# Altium PCB AD8302.PcbDoc
Units mil, origin at the board's own origin, x right, y up, seen from the top; angles counter-clockwise.
Board outline 1235 x 1010 mil, 2 copper layers (Top Layer, Bottom Layer), stack 54.77 mil thick; 20 components, 14 nets, 71 pads, 228 vias.
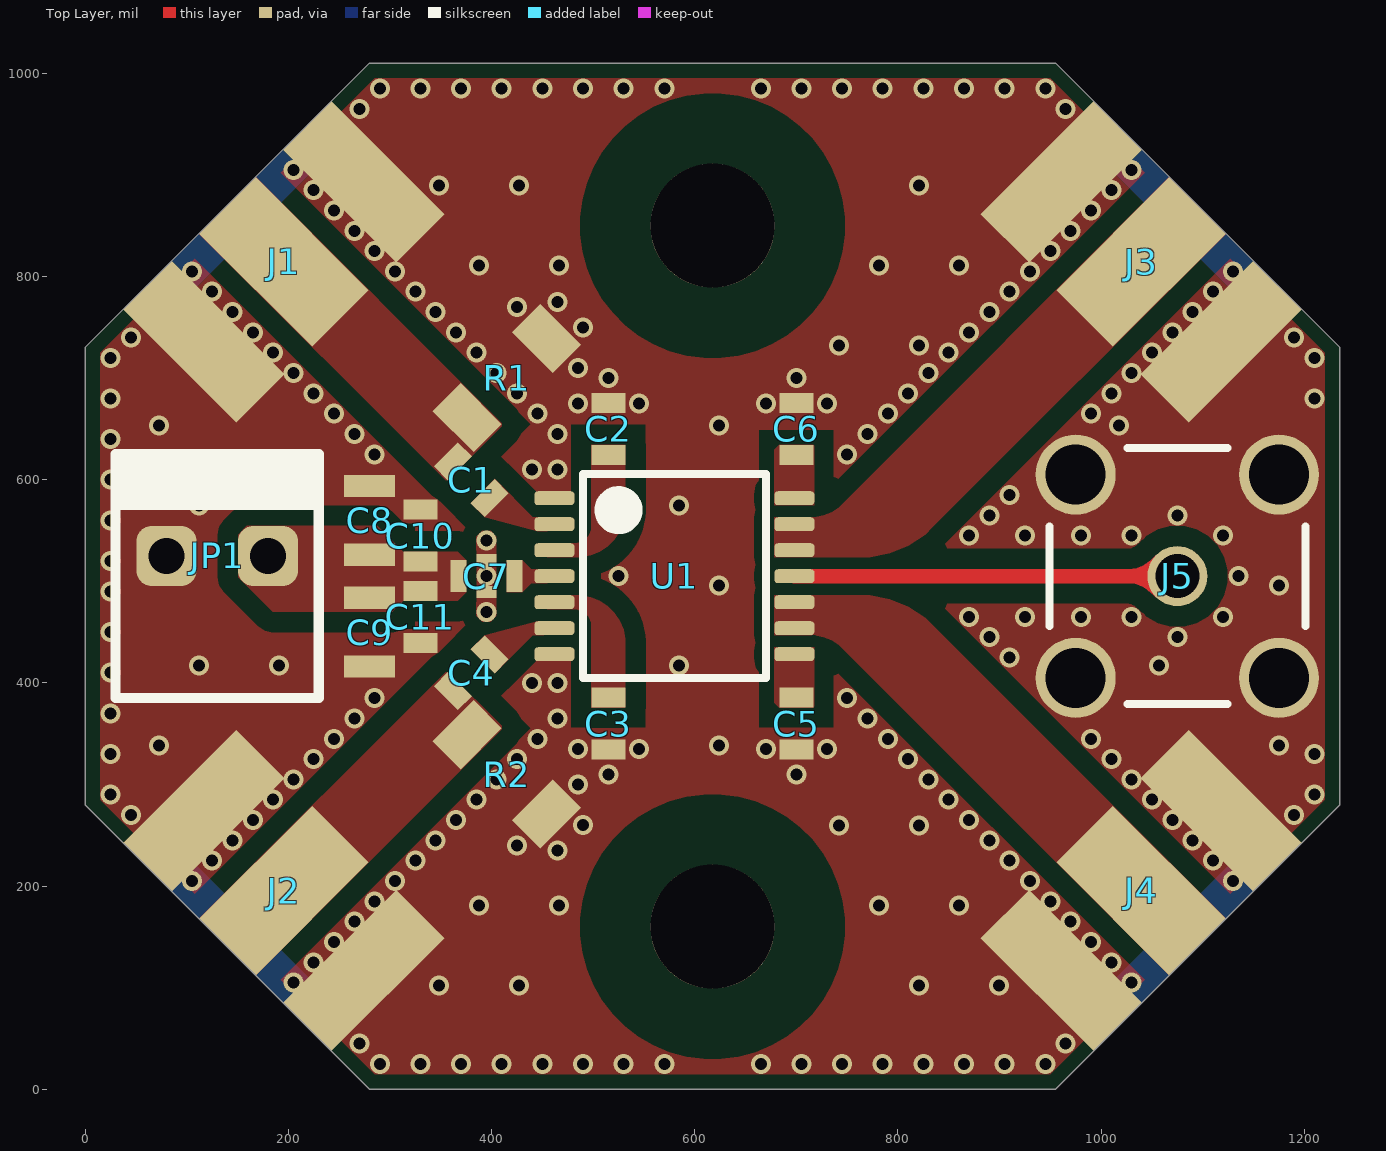
[diagram p0: Top Layer view]
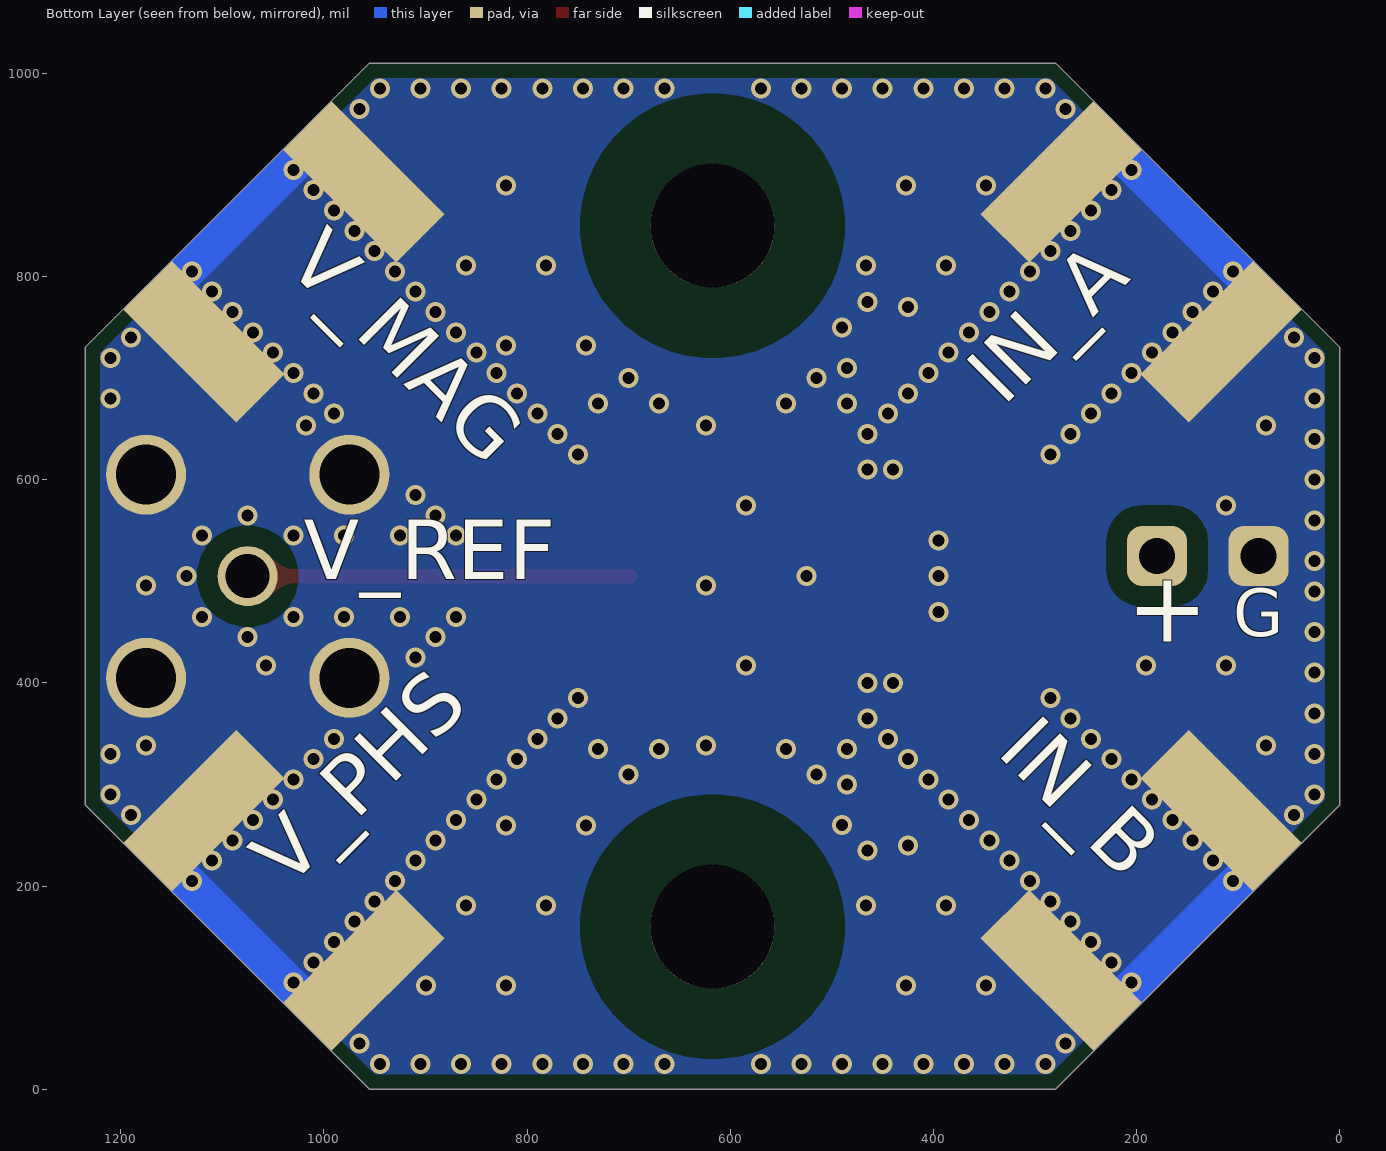
[diagram p1: Bottom Layer view, seen from below]
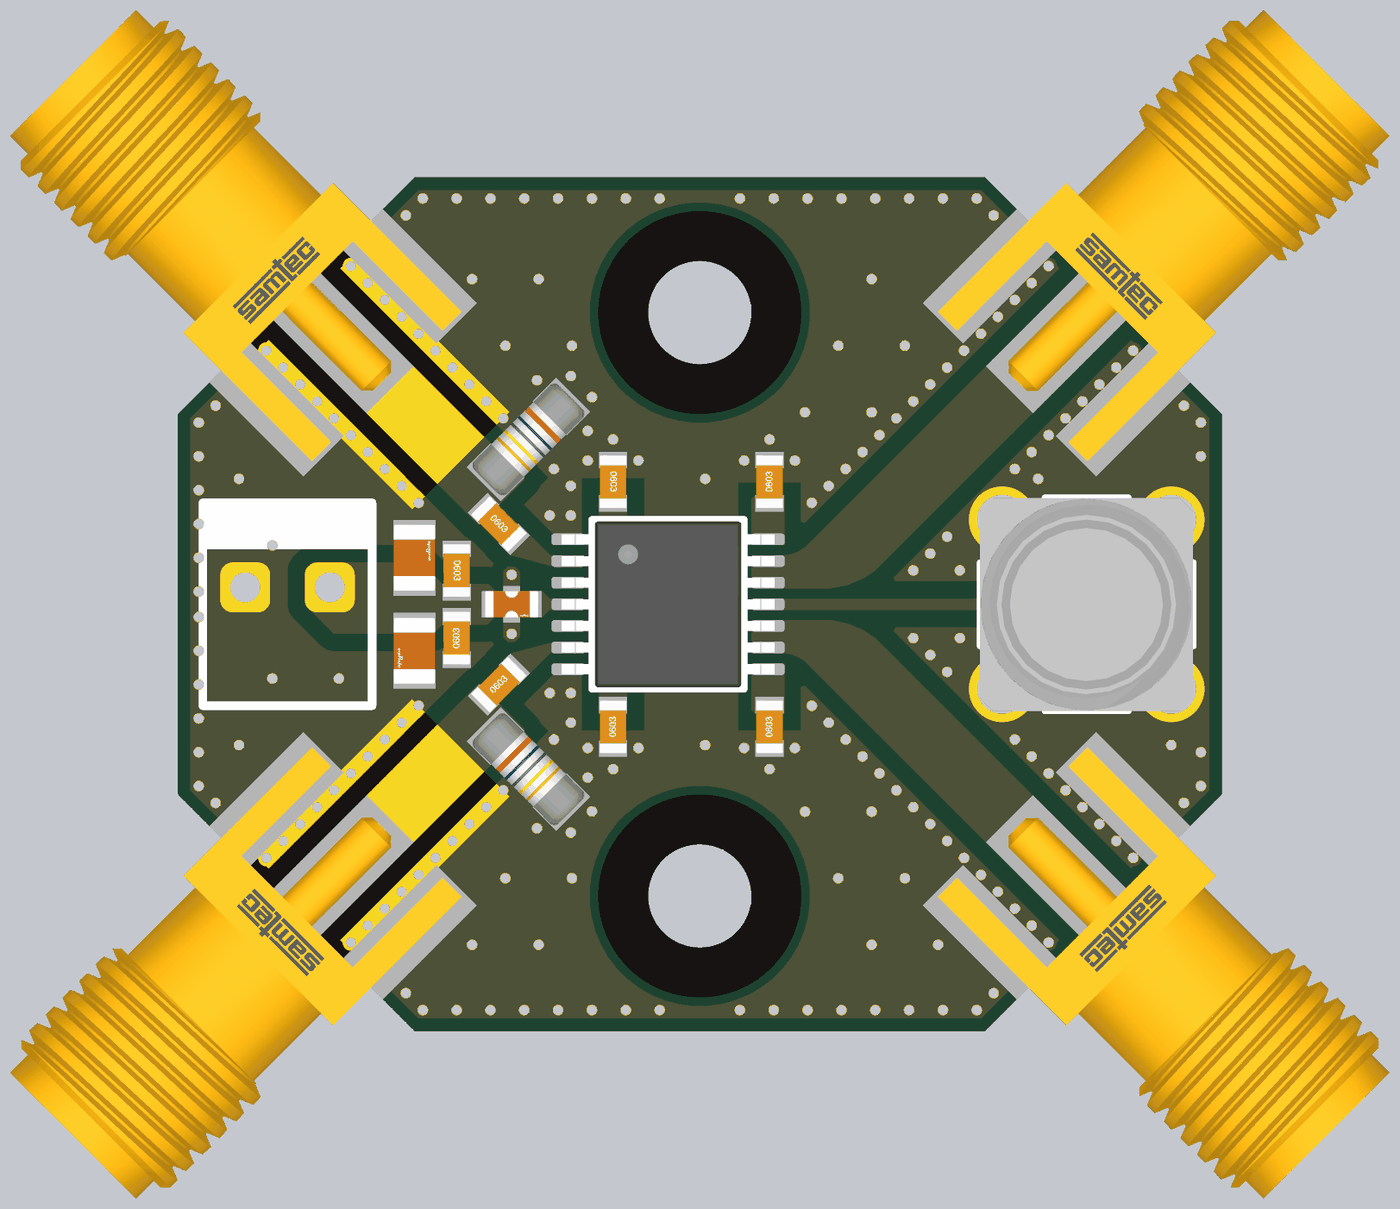
[diagram p2: 3D render of the assembled board from above, using the file's embedded part models]

## Layer stack, top to bottom
Top Solder: solder mask 0.4, Solder Resist, Dk 3.5
Top Layer: signal copper 1.4
Dielectric 1: dielectric 51.9701, FR-4, Dk 4.8
Bottom Layer: signal copper 1.4
Bottom Solder: solder mask 0.4, Solder Resist, Dk 3.5

## Board outline
0,280 280,0 955,0 1235,280 1235,730 955,1010 280,1010 0,730

## Design rules (kind name [scope] priority, off if disabled: settings)
Clearance [All] p1: gap=5 ignorepadtopadclearanceinfootprint=FALSE except(0: Arc-Hole Track-Hole SMDPad-Hole THPad-Hole Via-Hole Fill-Hole Poly-Hole Region-Hole Text-Hole)
PolygonConnect [All] p1: connectstyle=Direct reliefconductorwidth=10 reliefentries=4 polygonreliefangle="90 Angle" airgapwidth=10
RoutingVias [All] p1: holewidth=28 width=50 viastyle="Through Hole" minholewidth=28 minwidth=50 maxholewidth=28 maxwidth=50
SolderMaskExpansion [All] p1: expansion=4 istentingtop=FALSE
Width [All] p1: maxlimit=20 minlimit=10 preferedwidth=10
30 further rules are at their usual default settings.

## Components (designator, comment, footprint, x,y, rotation, side; value= is the part's Value field where it differs from the comment)
C1 "1uF" 0603_C 380,600 r315 top value=104
C2 "1uF" 0603_C 515,650 r270 top value=104
C3 "1uF" 0603_C 515,360 r90 top value=104
C4 "1uF" 0603_C 380,410 r45 top value=104
C5 "NC" 0603_C 700,360 r90 top value=104
C6 "NC" 0603_C 700,650 r90 top value=104
C7 "NFM18CC223R1C3D" FP-NFM18-0_1-e0_15_0_35-MFG 395,505 r0 top
C8 "22uF" 0805_C 280,560 r90 top value=104
C9 "22uF" 0805_C 280,450 r270 top value=104
C10 "10uF" 0603_C 330,545 r270 top value=104
C11 "10uF" 0603_C 330,465 r90 top value=104
J1 "SMA" FP-SMA-J-P-H-ST-EM1-MFG 190,820 r135 top
J2 "SMA" FP-SMA-J-P-H-ST-EM1-MFG 190,190 r225 top
J3 "SMA" FP-SMA-J-P-H-ST-EM1-MFG 1045,820 r45 top
J4 "SMA" FP-SMA-J-P-H-ST-EM1-MFG 1045,190 r315 top
J5 "SMA" TECO-5-1814832-1_V 1075,505 r0 top
JP1 "HDR-1X2" KF2510-LI-2P 130,525 r0 top
R1 "50" RES_MMA0204_3P6X1P4_VIS-L 415,700 r45 top value=1K
R2 "50" RES_MMA0204_3P6X1P4_VIS-L 415,310 r135 top value=1K
U1 "AD8302ARUZ" ADI-RU-14_L 580,505 r0 top

## Footprints (in the part's own frame and the unit in brackets; to place one, negate y for a bottom-side part, rotate by r counter-clockwise, add the part's x,y. Pads: shape width x height; smd on the part's side, far side on the other; paste and mask are expansions set on the pad)
0603_C [mm] "无极性贴片电容"
  rect 0.5x0.85 smd mask+0: 1(-0.65,0) 2(0.65,0)
  body extent -0.8,-0.41 0.8,0.41, height 0.81
0805_C [mil]
  rect 22x50 smd mask+0: 1(-33.86,0) 2(33.86,0)
  body extent -39,-25 39,25, height 57
ADI-RU-14_L [mm] "TSOP, 14-Leads, Body 5x4.4mm, Pitch 0.65mm, IPC High Density"
  rrect50% 1x0.35 smd mask+0: 1(-3,1.95) 2(-3,1.3) 3(-3,0.65) 4(-3,0) 5(-3,-0.65) 6(-3,-1.3) 7(-3,-1.95) 8(3,-1.95) 9(3,-1.3) 10(3,-0.65) 11(3,0) 12(3,0.65) 13(3,1.3) 14(3,1.95)
  silkscreen extent -2.29,-2.55 2.29,2.55, body extent -3.2,-2.5 3.2,2.5, height 1.1
FP-NFM18-0_1-e0_15_0_35-MFG [mm]
  rect 0.4x0.8 smd paste+0 mask+0: 1(-0.7,0) 3(0.7,0)
  rect 0.5x0.3 smd paste+0 mask+0: 2(0,-0.4) 2(0,0.4)
  body extent -1.2,-0.7 1.2,0.7, height 0.25
FP-SMA-J-P-H-ST-EM1-MFG [mm]
  rect 4x2 smd paste+0 mask+0: 1(-0.2,0)
  rect 4x1.716 smd paste+0 mask+0: 2(-0.2,-2.825) 3(-0.2,2.825)
  rect 4x1.716 smd far side paste+0 mask+0: 4(-0.2,-2.825) 5(-0.2,2.825)
  body extent -2.55,-3.6 11.43,3.6, height 0.25
KF2510-LI-2P [mm] "接插件/2A"
  rrect50% 1.5x1.5 hole 0.9 mask+0: 1(-1.27,0) 2(1.27,0)
  silkscreen extent -2.59,-3.56 2.54,2.54, body extent -2.54,-3.5 2.54,2.4, height 11.05
RES_MMA0204_3P6X1P4_VIS-L [mm]
  rect 1x1.45 smd paste+0 mask+0: 1(-1.4,0) 2(1.4,0)
  body extent -1.8,-0.7 1.8,0.7, height 1.4
TECO-5-1814832-1_V [mm] "THD, 5-Leads, Body 6.4x6.4mm, Pitch 5.08mm"
  round 1.5 hole 1.1 mask+0: 1(0,0)
  round 2 hole 1.5 mask+0: 2(-2.54,2.54) 3(-2.54,-2.54) 4(2.54,-2.54) 5(2.54,2.54)
  silkscreen extent -3.2,-3.2 3.2,3.2, body extent -3.21,-3.21 3.19,3.19, height 9.5

## Part data
C1 C2 C3 C4 C5 C6 C8 C9 C10 C11: library part CAP, "Capacitor", LatestRevisionDate=17-Jul-2002, LatestRevisionNote="Re-released for DXP Platform.", PackageReference=RAD-0.3, Published=8-Jun-2000, Publisher="Altium Limited"
C7: library part CMP-06053-000245-1, "Large Current 3 Terminals Low ESL Chip Multilayer Ceramic Capacitors for General Purpose, 0603, 22000pF, 20%, 16V", Capacitance=22nF, Case Code (Imperial)=0603, Case Code (Metric)=1608, Current=1A, DC Resistance (DCR)=50mR, Frequency=1kHz, Insulation Resistance=1GR, Max Operating Temperature=125°C, Max Voltage Rating (DC)=16V, Min Operating Temperature=-55°C, Package Quantity=1, Tolerance=20%, Case/Package=0603, Current Rating=1A, Depth=0.8mm, Height=0.6mm, Lead Free="Lead Free", Length=1.6mm, Max Current Rating=1A, Mount="Surface Mount", Packaging="Tape and Reel", Radiation Hardening=No, REACH SVHC="No SVHC", Termination=Flat, Voltage=16V, Voltage Rating=16V, Voltage Rating (DC)=16V, Width=0.8mm
J1 J2 J3 J4: library part CMP-02754-000006-1, "CONN SMA JACK STR 50OHM EDGE MNT", Dielectric Material=PTFE, Housing Color=Gold, Max Frequency=6GHz, Max Operating Temperature=125°C, Min Operating Temperature=-65°C, Package Quantity=1, Voltage Rating=335V, Body Material=Brass, Body Plating=Gold, Case/Package=SMA, Center Contact Plating=Gold, Connector Type=SMA, Contact Material=Copper, Contact Plating=Gold, Depth=13.33mm, Fastening Type=Threaded, Impedance=50R, Insulation Material=Polytetrafluoroethylene, Length=6.35mm, Mount=Edge, Orientation=Straight, Packaging=Tray, Radiation Hardening=No, RoHS Compliant=Yes, Series=SMA, Termination=Solder
J5: library part CMP-2000-05415-1, "SMA Connector, Pitch 5.08 mm, 1 Position, Height 9.5 mm, Tail Length 4 mm, -65 to 165 degC, RoHS, Bulk", Frequency Max=3GHz, Manufacturer="TE Connectivity", Package Description="SMA Connector, Pitch 5.08 mm, 1 Position, Height 9.5 mm, Tail Length 4 mm", Package Reference=5-1814832-1, Coaxial Cable Types=-, Coaxial Termination=Solder, Connector Body Style=StraightJack, Connector Mounting=PCBMount, Connector Type=SMACoaxial, Contact Material=BerylliumCopper, Contact Plating=GoldPlatedContacts, Datasheet URL=http://www.onlinecomponents.com/productFiles/mf-AMP/eng_cd_1814832_a.pdf, Datasheet Version="Rev. B1, 03/2011", Impedance=50ohm, Manufacturer URL=http://www.te.com/, Product Range=ZDCSeries, SVHC=NoSVHC(15-Jun-2015)
JP1: library part "Header 2", "2P接插件", BOM名称=2P接插件, 下单链接=https://item.taobao.com/item.htm?ft=t&id=613637044352, 淘宝ID=小糖豆的小窝窝
R1 R2: library part RES, "Resistor", Published=8-Jun-2000, Publisher="Altium Limited", Revision="July-2002: Re-released for DXP Platform."
U1: library part CMP-0284-00076-1, "LF-2.7 GHz RF/IF Gain and Phase Detector, 60ns Response Time, RU-14, Pb-Free, 96 Tube", RF Frequency (MHZ)=2700, Supply Current=19mA, Temp Stability (dB)=1dB, Voltage Supply (V)="2.7 to 5.5", Code_JEDEC=MO-153AB-1, ComponentLink1Description="Manufacturer URL", ComponentLink1URL=www.analog.com, ComponentLink2Description=Datasheet, ComponentLink2URL=http://www.analog.com/static/imported-files/data_sheets/AD8302.pdf, ComponentLink3Description="Package Specification", ComponentLink3URL=http://www.analog.com/static/imported-files/packages/36057385283879153717235186773RU14.pdf, DatasheetVersion="Rev. A", Dynamic Range (dB)=60dB, PackageDescription="14-Lead Thin Shrink Small Outline Package [TSSOP]", PackageReference=RU-14, PackageVersion=Aug-2002, Product Description="Dual-Channel Gain and Phase Outputs", Response Time (ns typ)=60ns

## Free pads (board coordinates)
  round 122.05 hole 122.05 unplated mask+59.06: 4(617.5,160) 4(617.5,850)

## Via types
v1: diameter 19.68, hole 11.81, Top Layer to Bottom Layer, tented both sides, 228 vias

## Nets (pads, with @x,y where several pads share a name; then routed paths per layer and width w, separated by ;. In a path a pad name is that pad's centre, name@x,y a point inside that pad or via, vN(x,y) a via of type N, cw(c..) or ccw(c..) an arc to the next point about the centre after c; other vN are vias at no path point)
+2.7~+5: C7.3 U1.4
GND: C2.1 C3.1 C5.1 C6.2 C7.2 C8.2 C9.2 C10.1 C11.1 J1.2 J1.3 J1.4 J1.5 J2.2 J2.3 J2.4 J2.5 J3.2 J3.3 J3.4 J3.5 J4.2 J4.3 J4.4 J4.5 J5.2 J5.3 J5.4 J5.5 JP1.1 R1.2 R2.1 U1.1 U1.7
  other v1: 290,25 330,25 370,25 410,25 450,25 490,25 530,25 570,25 665,25 705,25 745,25 785,25 825,25 865,25 905,25 945,25 270,45 965,45 348.23,102.21 426.97,102.21 820.67,102.21 899.41,102.21 205,105 1030,105 225,125 1010,125 245,145 990,145 265,165 970,165 387.6,180.95 466.34,180.95 781.3,180.95 860.04,180.95 285,185 950,185 105,205 305,205 930,205 1130,205 125,225 325,225 910,225 1110,225 465.01,235 425.01,240 145,245 345,245 890,245 1090,245 490.01,260 741.93,259.69 820.67,259.69 165,265 365,265 870,265 1070,265 45,270 1190,270 185,285 385,285 850,285 1050,285 25,290 1210,290 485.01,300 205,305 405,305 830,305 1030,305 515.01,310 700.01,310 225,325 425,325 810,325 1010,325 25,330 1210,330 485.01,335 545.01,335 670.01,335 730.01,335 72.64,338.43 623.82,338.43 1175,338.43 245,345 445,345 790,345 990,345 265,365 465,365 770,365 25,370 285,385 750,385 440,400 465,400 25,410 112.01,417.17 190.75,417.17 584.45,417.17 1056.89,417.17 910,425 890,445 1075,445 25,450 870,465 925,465 980,465 1030,465 1120,465 395,470 25,490 623.82,495.91 1175,495.91 395,505 525,505 1135,505 25,520 395,540 870,545 925,545 980,545 1030,545 1120,545 25,560 890,565 1075,565 112.01,574.65 584.45,574.65 910,585 25,600 440,610 465,610 285,625 750,625 25,640 265,645 465,645 770,645 72.64,653.39 623.82,653.39 1017.52,653.39 245,665 445,665 790,665 990,665 485,675 545,675 670,675 730,675 25,680 1210,680 225,685 425,685 810,685 1010,685 515,700 700,700 205,705 405,705 830,705 1030,705 485,710 25,720 1210,720 185,725 385,725 850,725 1050,725 741.93,732.13 820.67,732.13 45,740 1190,740 165,745 365,745 870,745 1070,745 490,750 145,765 345,765 890,765 1090,765 425,770 465,775 125,785 325,785 910,785 1110,785 105,805 305,805 930,805 1130,805 387.6,810.87 466.34,810.87 781.3,810.87 860.04,810.87 285,825 950,825 265,845 970,845 245,865 990,865 225,885 1010,885 348.23,889.61 426.97,889.61 820.67,889.61 205,905 1030,905 270,965 965,965 290,985 330,985 370,985 410,985 450,985 490,985 530,985 570,985 665,985 705,985 745,985 785,985 825,985 865,985 905,985 945,985
NetC1_1: C1.1 J1.1 R1.1
NetC1_2: C1.2 U1.2
NetC2_2: C2.2 U1.3
NetC3_2: C3.2 U1.5
NetC4_1: C4.1 J2.1 R2.2
NetC4_2: C4.2 U1.6
NetC5_2: C5.2 U1.8
NetC6_1: C6.1 U1.14
NetC7_1: C7.1 C8.1 C9.1 C10.2 C11.2 JP1.2
NetJ3_1: J3.1 U1.12 U1.13
NetJ4_1: J4.1 U1.9 U1.10
Vref: J5.1 U1.11 | length 376.9
  Top Layer w14: U1.11 J5.1

## Polygon pours and split planes (outlines as drawn)
GND on Top Layer "NONET_L-01_P-001" (solid, remove dead copper, pour order 22): 390.92,460.16 385.16,465.92 385.16,544.06 390.94,549.84 399.08,549.84 404.85,544.07 404.85,465.93 399.07,460.16
NetC6_1 on Top Layer "NONET_L-01_P-001" (solid, remove dead copper, pour order 21): 678.43,574.89 717.79,574.89 717.79,633.2 716.73,634.25 683.27,634.25 678.43,629.41
NetC5_2 on Top Layer "NONET_L-01_P-001" (solid, remove dead copper, pour order 20): 678.43,435.11 717.79,435.11 717.79,376.8 716.73,375.75 683.27,375.75 678.43,380.59
GND on Top Layer "NONET_L-01_P-001" (solid, remove dead copper, pour order 18): 285,995 15,725 15,285 285,15 950,15 1220,285 1220,725 950,995
NetC7_1 on Top Layer "NONET_L-01_P-001" (solid, remove dead copper, pour order 17): 312.94,480.78 302.15,470 184.57,470 150.47,504.11 150.47,545.85 159.14,554.53 287.66,554.53 312.94,529.25 366.81,529.25 375.31,520.75 375.31,489.26 366.84,480.78
NetJ4_1 on Top Layer "NONET_L-01_P-001" (solid, remove dead copper, pour order 16): 762.97,486.28 cw(c762.97,386.28) 833.68,456.99 1122.94,167.73 1067.27,112.05 744.68,434.64 ccw(c715,404.96) 715,446.94 678.43,446.94 678.43,486.28
NetJ3_1 on Top Layer "NONET_L-01_P-001" (solid, remove dead copper, pour order 15): 762.97,523.72 ccw(c762.97,623.72) 833.68,553.01 1122.94,842.27 1067.27,897.95 744.68,575.36 cw(c715,605.04) 715,563.06 678.43,563.06 678.43,523.72
NetC3_2 on Top Layer "NONET_L-01_P-001" (solid, remove dead copper, pour order 14): 483.71,486.29 cw(c483.71,438.27) 531.73,438.27 531.73,375.74 498.26,375.74 498.26,455.77 ccw(c481.5,455.77) 481.5,472.53 455,472.53 455,486.29
NetC2_2 on Top Layer "NONET_L-01_P-001" (solid, remove dead copper, pour order 13): 483.71,523.71 ccw(c483.71,571.73) 531.73,571.73 531.73,634.26 498.26,634.26 498.26,554.23 cw(c481.5,554.23) 481.5,537.47 455,537.47 455,523.71
NetC1_2 on Top Layer "NONET_L-01_P-001" (solid, remove dead copper, pour order 11): 379.3,577.04 393.19,563.15 445.19,549.29 455,549.29 455,563.06 440.6,563.06 402.96,600.7
NetC4_2 on Top Layer "NONET_L-01_P-001" (solid, remove dead copper, pour order 12): 379.3,432.96 393.19,446.85 445.2,460.7 455,460.7 455,446.94 440.6,446.94 402.97,409.3
+2.7~+5 on Top Layer "NONET_L-01_P-001" (solid, remove dead copper, pour order 9): 414.69,520.74 414.69,489.26 430.43,489.26 439.28,498.11 455,498.11 455,511.9 439.27,511.9 430.43,520.74
NetC4_1 on Top Layer "NONET_L-01_P-001" (solid, pour order 8): 167.73,112.05 410.12,354.44 410.12,357.6 357.03,410.69 355.02,410.69 112.05,167.73
NetC1_1 on Top Layer "NONET_L-01_P-001" (solid, pour order 7): 167.73,897.95 410.12,655.56 410.12,652.4 357.03,599.31 355.02,599.31 112.05,842.27
GND on Bottom Layer "NONET_L-01_P-001" (solid, remove dead copper, pour order 19): 1220,725 1220,285 950,15 285,15 15,285 15,725 285,995 950,995

## Other copper
Top Layer:
  pour cut-out: 617.5,980 cw(c617.5,850) 747.5,850 cw(c617.5,850) 617.5,720 cw(c617.5,850) 487.5,850 cw(c617.5,850)
  pour cut-out: 617.5,290 cw(c617.5,160) 747.5,160 cw(c617.5,160) 617.5,30 cw(c617.5,160) 487.5,160 cw(c617.5,160)
Bottom Layer:
  pour cut-out: 617.5,290 cw(c617.5,160) 747.5,160 cw(c617.5,160) 617.5,30 cw(c617.5,160) 487.5,160 cw(c617.5,160)
  pour cut-out: 617.5,980 cw(c617.5,850) 747.5,850 cw(c617.5,850) 617.5,720 cw(c617.5,850) 487.5,850 cw(c617.5,850)
  region net GND: 240,970 265,945 65,745 40,770
  region net GND: 1195,770 1170,745 970,945 995,970
  region net GND: 995,40 970,65 1170,265 1195,240
  region net GND: 40,240 65,265 265,65 240,40

## Silkscreen, mask and mechanical layers (free items; w line width, h text height)
Bottom Overlay:
  text "V_MAG" at 1052.38,797.49 h100 r45
  text "IN_A" at 317.56,657.56 h100 r315
  text "V_REF" at 1019.91,482.76 h100
  text "G" at 105,430.89 h80
  text "+" at 210,417.56 h120
  text "IN_B" at 352.44,317.56 h100 r45
  text "V_PHS" at 1022.49,182.62 h100 r315
Top Solder:
  region: 82.5,197.5 197.5,82.5 392.5,277.5 277.5,392.5
  region: 197.5,927.5 82.5,812.5 277.5,617.5 392.5,732.5
Bottom Solder:
  region: 1195,770 1170,745 970,945 995,970
  region: 995,40 970,65 1170,265 1195,240
  region: 40,240 65,265 265,65 240,40
  region: 240,970 265,945 65,745 40,770
Mechanical 1:
  the board outline again, w5